# EAGLE board Projeto board NOVO (EAGLE 9.6.2)
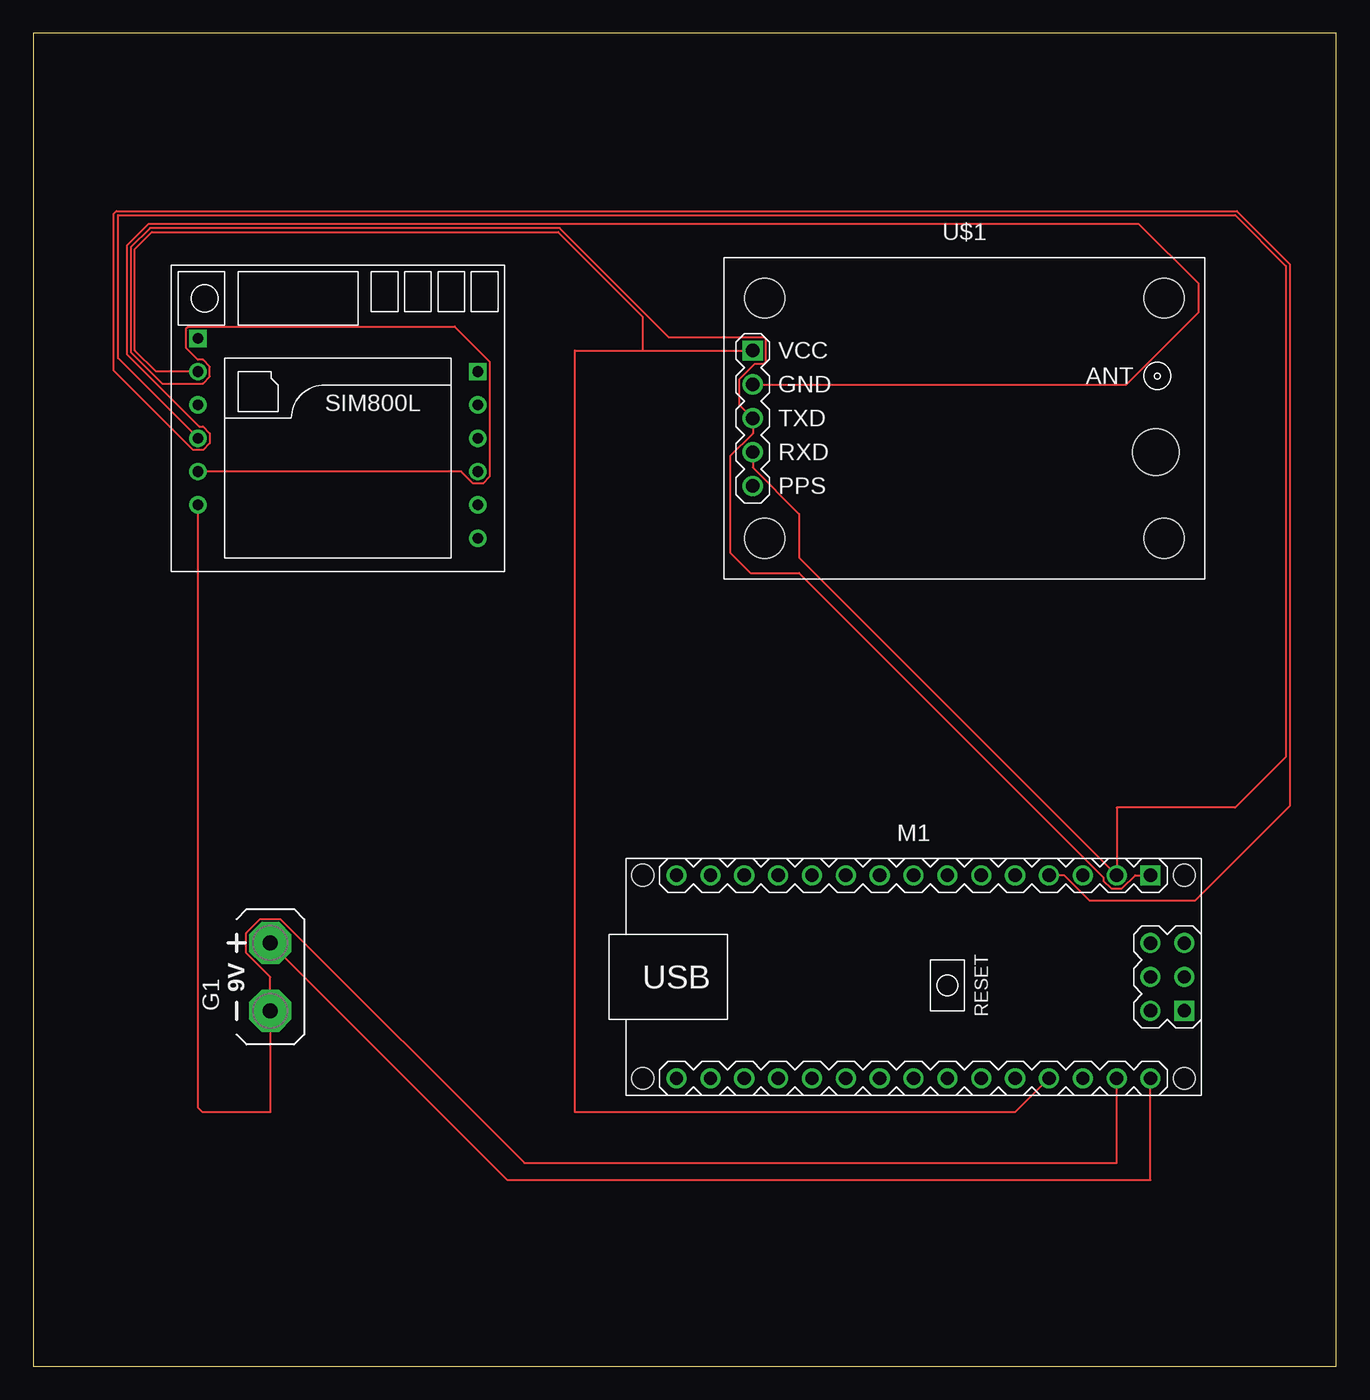
[diagram p0: board, top side]

Size 97.77 x 100 mm. Coordinates in mm from the lower left corner, seen from the top.
Outline: 0,0 97.77,0 97.77,100 0,100 0,0
Copper layers (1*16): Top 0.035mm / dielectric 1.5mm / Bottom 0.035mm
Design rules "default": minimum track width 6mil, minimum drill 0.35mm, track to track 6mil, track to pad 6mil, pad to pad 6mil, via to via 6mil, smd to smd 6mil, copper to edge 40mil, drill to drill 6mil, minimum pad ring 10mil, minimum via ring 8mil, stop-mask expansion 4mil, vias tented up to drill 0mil, thermal gap 10mil

## Footprints (pad centres in the part's own frame; a part is rotated, then mirrored left to right if it is on the bottom)
AB9V = drill 1.118 pad 3.15 octagon: + 0,2.54; - 0,-2.54
ARDUINO-NANO-3.0#ISP = drill 1 square: J1.1 17.78,7.62; J4.1 20.32,-2.54 | drill 1: J1.2 15.24,7.62; J1.3 12.7,7.62; J1.4 10.16,7.62; J1.5 7.62,7.62; J1.6 5.08,7.62; J1.7 2.54,7.62; J1.8 0,7.62; J1.9 -2.54,7.62; J1.10 -5.08,7.62; J1.11 -7.62,7.62; J1.12 -10.16,7.62; J1.13 -12.7,7.62; J1.14 -15.24,7.62; J1.15 -17.78,7.62; J2.1 17.78,-7.62; J2.2 15.24,-7.62; J2.3 12.7,-7.62; J2.4 10.16,-7.62; J2.5 7.62,-7.62; J2.6 5.08,-7.62; J2.7 2.54,-7.62; J2.8 0,-7.62; J2.9 -2.54,-7.62; J2.10 -5.08,-7.62; J2.11 -7.62,-7.62; J2.12 -10.16,-7.62; J2.13 -12.7,-7.62; J2.14 -15.24,-7.62; J2.15 -17.78,-7.62; J4.2 17.78,-2.54; J4.3 20.32,0; J4.4 17.78,0; J4.5 20.32,2.54; J4.6 17.78,2.54 | hole 1.651: -20.32,7.62; -20.32,-7.62; 20.32,-7.62; 20.32,7.62
GPS-RECEIVER-NEO6M = drill 1 square: 1 -15.875,5.08 | drill 1: 2 -15.875,2.54; 3 -15.875,0; 4 -15.875,-2.54; 5 -15.875,-5.08 | hole 3: -14.986,9.017; -14.986,-9.017; 14.986,-9.017; 14.986,9.017 | hole 3.5: 14.351,-2.54
SIM800LMODULE = drill 0.8: DTR 10.5,1; GND -10.5,-6.5; MIC+ 10.5,-1.5; MIC- 10.5,-4; RST -10.5,1; RX -10.5,-1.5; SPK+ 10.5,-6.5; SPK- 10.5,-9; TX -10.5,-4; VCC -10.5,3.5 | drill 0.8 square: NET -10.5,6; RING 10.5,3.5

## Placement (x,y rotation side)
G1  AB9V  [AB9V]  17.78,29.21 0 top
M1  ARDUINO-NANO-3.0#ISP  [ARDUINO-NANO-3.0#ISP]  66.04,29.21 0 top
U$1  GPS-RECEIVER-NEO6M  [GPS-RECEIVER-NEO6M]  69.85,71.12 0 top
U$2  SIM800LMODULE  [SIM800LMODULE]  22.86,71.12 0 top

## Library data of the parts
G1 = battery
M1 U$1 = diy-modules
U$2 = SIM800LMODULE

## Nets
3V3: M1.J2.14
N$1: G1.+ M1.J2.1
N$2: G1.- M1.J2.2 U$2.GND
N$3: M1.J2.4 U$1.1 U$2.VCC
N$4: M1.J1.4 U$1.2
N$5: M1.J1.1 U$1.3 U$2.TX
N$6: M1.J1.2 U$1.4 U$2.RX
PPS: U$1.5

## Tracks (layer width: path | path; a pad name or v marks a point on that pad's centre or on a via)
N$1
  Top 0.152: G1.+ 35.56,13.97 83.82,13.97 M1.J2.1
N$2
  Top 0.152: M1.J2.2 81.28,15.24 36.84,15.24 18.53,33.55 17.03,33.55 15.98,32.5 15.98,31 17.78,29.2 G1.- 17.78,19.05 12.7,19.05 12.36,19.39 U$2.GND
N$3
  Top 0.152: M1.J2.4 73.66,19.05 40.64,19.05 40.64,76.2 45.72,76.2 | 45.72,76.2 U$1.1 | U$2.VCC 9.2,74.62 7.62,76.2 7.62,83.82 8.89,85.09 39.37,85.09 45.72,78.74 45.72,76.2
N$4
  Top 0.152: M1.J1.4 77.35,36.83 79.27,34.91 87.15,34.91 94.28,42.04 94.28,82.68 90.3,86.67 6.22,86.67 6.05,86.49 6.05,74.69 11.99,68.74 12.73,68.74 13.24,69.25 13.24,69.99 12.73,70.5 12.46,70.5 7.01,75.95 7.01,84.07 8.64,85.7 82.94,85.7 87.43,81.21 87.43,79.06 82.03,73.66 U$1.2
N$5
  Top 0.152: M1.J1.1 82.67,36.83 81.69,35.85 80.87,35.85 80.3,36.42 80.3,36.66 57.45,59.51 53.79,59.51 52.27,61.03 52.27,68.27 53.98,69.97 U$1.3 52.99,72.1 52.99,74.07 54.14,75.22 54.82,75.22 54.96,75.35 54.96,77.05 54.82,77.18 47.71,77.18 39.5,85.39 8.76,85.39 7.32,83.95 7.32,76.07 9.65,73.74 12.73,73.74 13.24,74.25 13.24,74.99 12.73,75.5 12.35,75.5 11.48,76.37 11.48,77.87 11.61,78 31.61,78 34.24,75.37 34.24,66.75 33.73,66.24 32.99,66.24 32.11,67.12 U$2.TX
N$6
  Top 0.152: U$2.RX 6.35,75.63 6.35,86.36 90.17,86.36 93.98,82.55 93.98,45.72 90.17,41.91 81.28,41.91 M1.J1.2 57.46,60.65 57.46,63.95 53.98,67.43 U$1.4